# Altium PCB JTAG_POGOPIN_REV_A.PcbDoc
Units mm, origin at the board's own origin, x right, y up, seen from the top; angles counter-clockwise.
Board outline 20 x 34 mm, 2 copper layers (TOP, BOT), stack 0.325 mm thick; 2 components, 8 nets, 25 pads, 16 vias.
Unrouted connection lines stored in the file: 2.
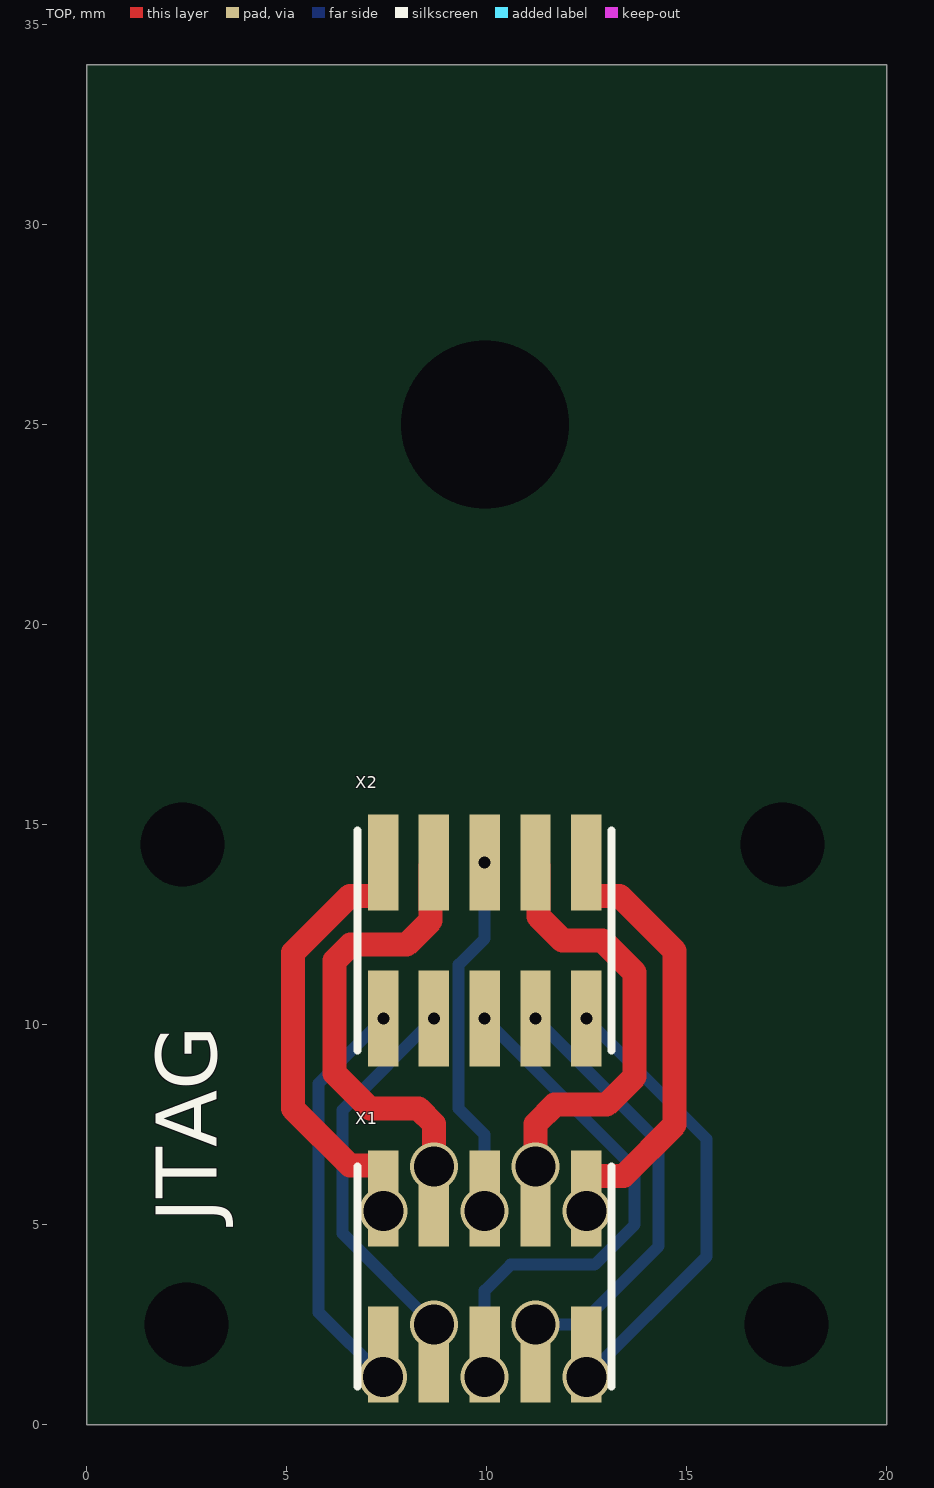
[diagram p0: TOP view]
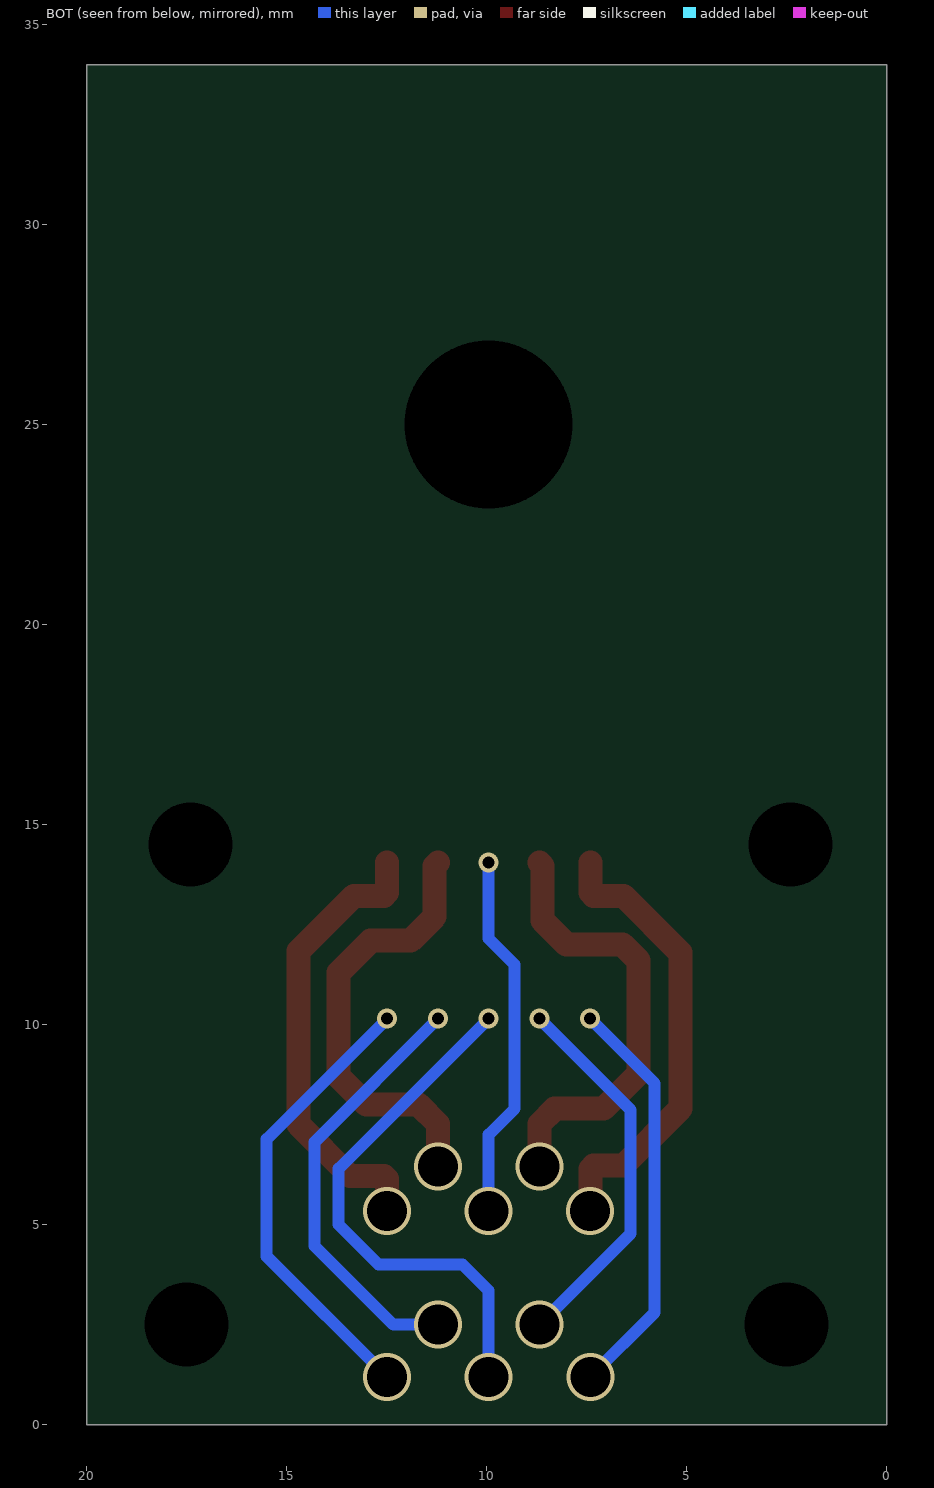
[diagram p1: BOT view, seen from below]

## Layer stack, top to bottom
Top Solder: solder mask 0.0102, Solder Resist, Dk 3.5
TOP: signal copper 0.0356
Dielectric 1: core 0.254, FR-4, Dk 4.2
BOT: signal copper 0.0356
Solder Side: solder mask 0.0102, Solder Resist, Dk 3.5

## Board outline
0,0 0,34 20,34 20,0

## Design rules (kind name [scope] priority, off if disabled: settings)
Clearance Clearance_GND_GND [InNet('GND') vs InNet('GND')] p1: gap=0 ignorepadtopadclearanceinfootprint=FALSE
Clearance [All] p2: gap=0.2 ignorepadtopadclearanceinfootprint=FALSE except(0: Arc-Region Arc-Hole Track-Region Track-Hole SMDPad-Region SMDPad-Hole THPad-Region THPad-Hole Via-Region Via-Hole Fill-Region Fill-Hole Poly-Region Poly-Hole Region-Region Region-Hole Text-Hole)
ComponentClearance [All] p1: gap=0.01 collisioncheckmode=3 verticalgap=0.254 showdistances=FALSE
HoleSize [All] p1: absolutevalues=TRUE maxlimit=10 minlimit=0.025 maxpercent=80.000 minpercent=20.000
MinimumSolderMaskSliver [All] p1 off: minsoldermaskwidth=0.1
PlaneClearance [All] p1: clearance=0
PolygonConnect PolygonConnect_via [isvia] p1: connectstyle=Direct reliefconductorwidth=0.254 reliefentries=4 polygonreliefangle="45 Angle" airgapwidth=0.15
PolygonConnect [All] p2: connectstyle=Relief reliefconductorwidth=0.254 reliefentries=4 polygonreliefangle="90 Angle" airgapwidth=0.1
RoomDefinition JTAG_POGOPIN_REV_A [InComponentClass('JTAG_POGOPIN_REV_A')] p1: confinementstyle=ConfineOut formatcopy=TRUE lockcomponents=FALSE outline -287.018,-175.424 -236.218,-175.424 -236.218,-150.024 -287.018,-150.024
RoutingVias [All] p1: holewidth=0.6 width=0.9 viastyle="Through Hole" minholewidth=0.3 minwidth=0.5 maxholewidth=0.9 maxwidth=1.2
SilkToSilkClearance [All] p1 off: silktosilkclearance=0.1
SilkToSolderMaskClearance SilkscreenOverComponentPads [IsPad] p1 off: minsilkscreentomaskgap=0.1 clearancetoexposedcopper=TRUE
SolderMaskExpansion [All] p1: expansion=0.102 istentingtop=FALSE
Width [All] p1: maxlimit=10 minlimit=0.15 preferedwidth=0.3
24 further rules are at their usual default settings.

## Components (designator, comment, footprint, x,y, rotation, side; value= is the part's Value field where it differs from the comment)
X1 "FCI male 2x5" "FCI header M2x5" 9.95,3.7 r0 top
X2 "FCI male 2x5" "FCI header M2x5" 9.95,12.099 r0 top

## Footprints (in the part's own frame and the unit in brackets; to place one, negate y for a bottom-side part, rotate by r counter-clockwise, add the part's x,y. Pads: shape width x height; smd on the part's side, far side on the other; paste and mask are expansions set on the pad)
"FCI header M2x5" [mm] "2x5 pin header 1.27mm pich 20021121-00010C4LF"
  rect 0.76x2.4 smd mask+0.025: 1(-2.54,-1.95) 2(-2.54,1.95) 3(-1.27,-1.95) 4(-1.27,1.95) 5(0,-1.95) 6(0,1.95) 7(1.27,-1.95) 8(1.27,1.95) 9(2.54,-1.95) 10(2.54,1.95)
  silkscreen extent -3.17,-2.75 3.17,2.75, body extent -3.17,-2.75 3.18,2.75, height 4.5

## Part data
X1 X2: Manufacturer=FCI, Part Number=20021121-00010C4LF, Temperature=-40÷85°C, Part Description="10 pin SMD straight pin header 1.27mm pich", PartFootprint=SMD

## Free pads (board coordinates)
  round 1.6 hole 2.1 unplated: 6(2.4,14.5) 6(2.5,2.5) 6(17.4,14.5) 6(17.5,2.5)
  round 1.6 hole 4.2 unplated: 6(9.96,25)

## Via types
v1: diameter 1.2, hole 1, TOP to BOT, tented both sides, 10 vias
v2: diameter 0.5, hole 0.3, TOP to BOT, tented both sides, 6 vias

## Nets (pads, with @x,y where several pads share a name; then routed paths per layer and width w, separated by ;. In a path a pad name is that pad's centre, name@x,y a point inside that pad or via, vN(x,y) a via of type N, cw(c..) or ccw(c..) an arc to the next point about the centre after c; other vN are vias at no path point)
3.3V: X1.1 X2.1 | length 10.3
  BOT w0.3: v1(7.41,1.196) 5.8,2.806 5.8,8.534 v2(7.415,10.149)
GND: X1.3 X1.5 X1.9 X2.3 X2.5 X2.9 | length 34.3
  BOT w0.3: v1(8.68,2.5) 6.4,4.78 6.4,7.869 v2(8.68,10.149) ; v1(9.95,1.196) 9.95,3.35 10.6,4 12.7,4 13.7,5 13.7,6.399 v2(9.95,10.149) ; v1(12.49,1.196) 15.5,4.206 15.5,7.139 v2(12.49,10.149)
JTAG_TCK: X1.4 X2.4 | length 11.2
  TOP w0.6: v1(8.68,6.45) 8.68,7.52 8.301,7.899 7.084,7.899 6.2,8.784 6.2,11.6 6.6,12 8,12 8.6,12.6 8.6,13.969 X2.4
JTAG_TDI: X1.8 X2.8 | length 11
  TOP w0.6: v1(11.22,6.45) 11.22,7.52 11.7,8 13,8 13.7,8.7 13.7,11.3 12.901,12.099 11.901,12.099 11.3,12.7 11.3,13.969 X2.8
JTAG_TDO: X1.6 X2.6 | length 9.2
  BOT w0.3: v1(9.95,5.342) 9.95,7.25 9.3,7.9 9.3,11.5 9.95,12.15 v2(9.95,14.049)
JTAG_TMS: X1.2 X2.2 | length 11.1
  TOP w0.6: X1.2 7.41,6.396 7.33,6.476 6.584,6.476 5.161,7.899 5.161,11.8 6.584,13.223 7.33,13.223 7.41,13.303 X2.2
  other v1: 7.415,5.342
n: X1.7 X2.7 | length 10.9
  BOT w0.3: v1(11.22,2.5) 12.335,2.5 14.3,4.465 14.3,7.069 v2(11.22,10.149)
nRST: X1.10 X2.10 | length 11.5
  TOP w0.6: v1(12.49,5.342) X1.10 12.49,6.139 12.57,6.219 13.419,6.219 14.7,7.5 14.7,11.839 13.316,13.223 12.57,13.223 12.49,13.303 X2.10

## Silkscreen, mask and mechanical layers (free items; w line width, h text height)
Top Overlay:
  text "JTAG" at 3.246,5.054 h1.52 r90
Top Solder:
  text "REV-A" at 0.8,32.8 h0.7
  text "2025-10" at 0.8,31.7 h0.7
M2:
  the board outline again, w0.1

## Dimensions
0,34 to 20,34 on M16
20,34 to 20,0 on M16
2.5,2.5 to 2.4,14.5 on M16
2.5,2.5 to 17.5,2.5 on M16